# EAGLE board RCT_Board_s2023 (EAGLE 9.2.0)
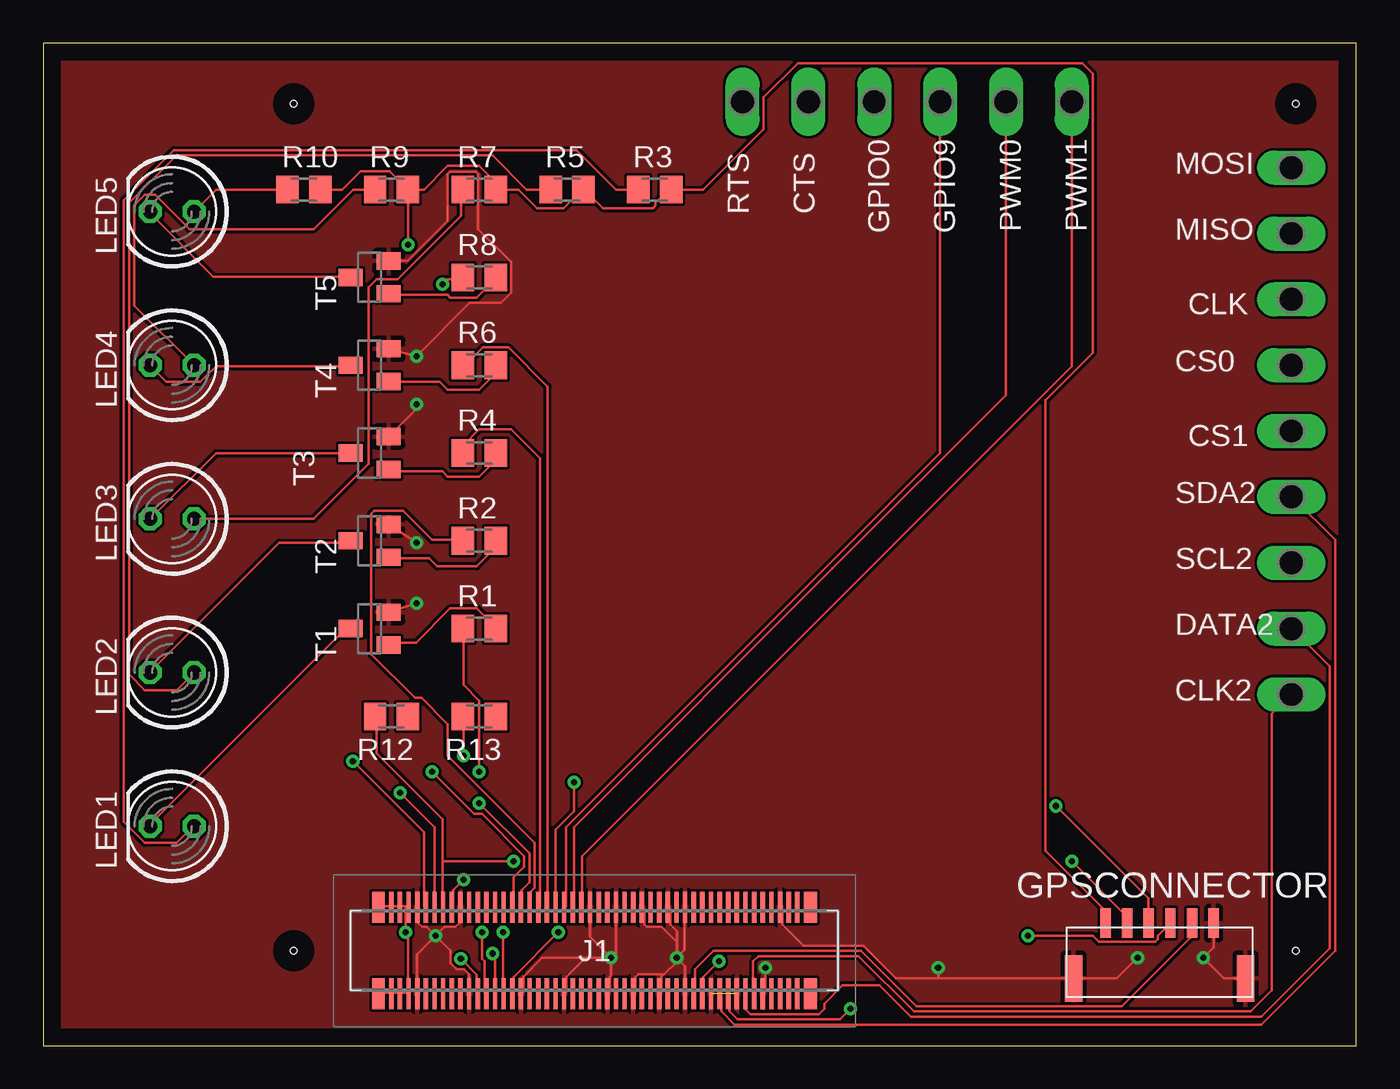
[diagram p0: board, top side]
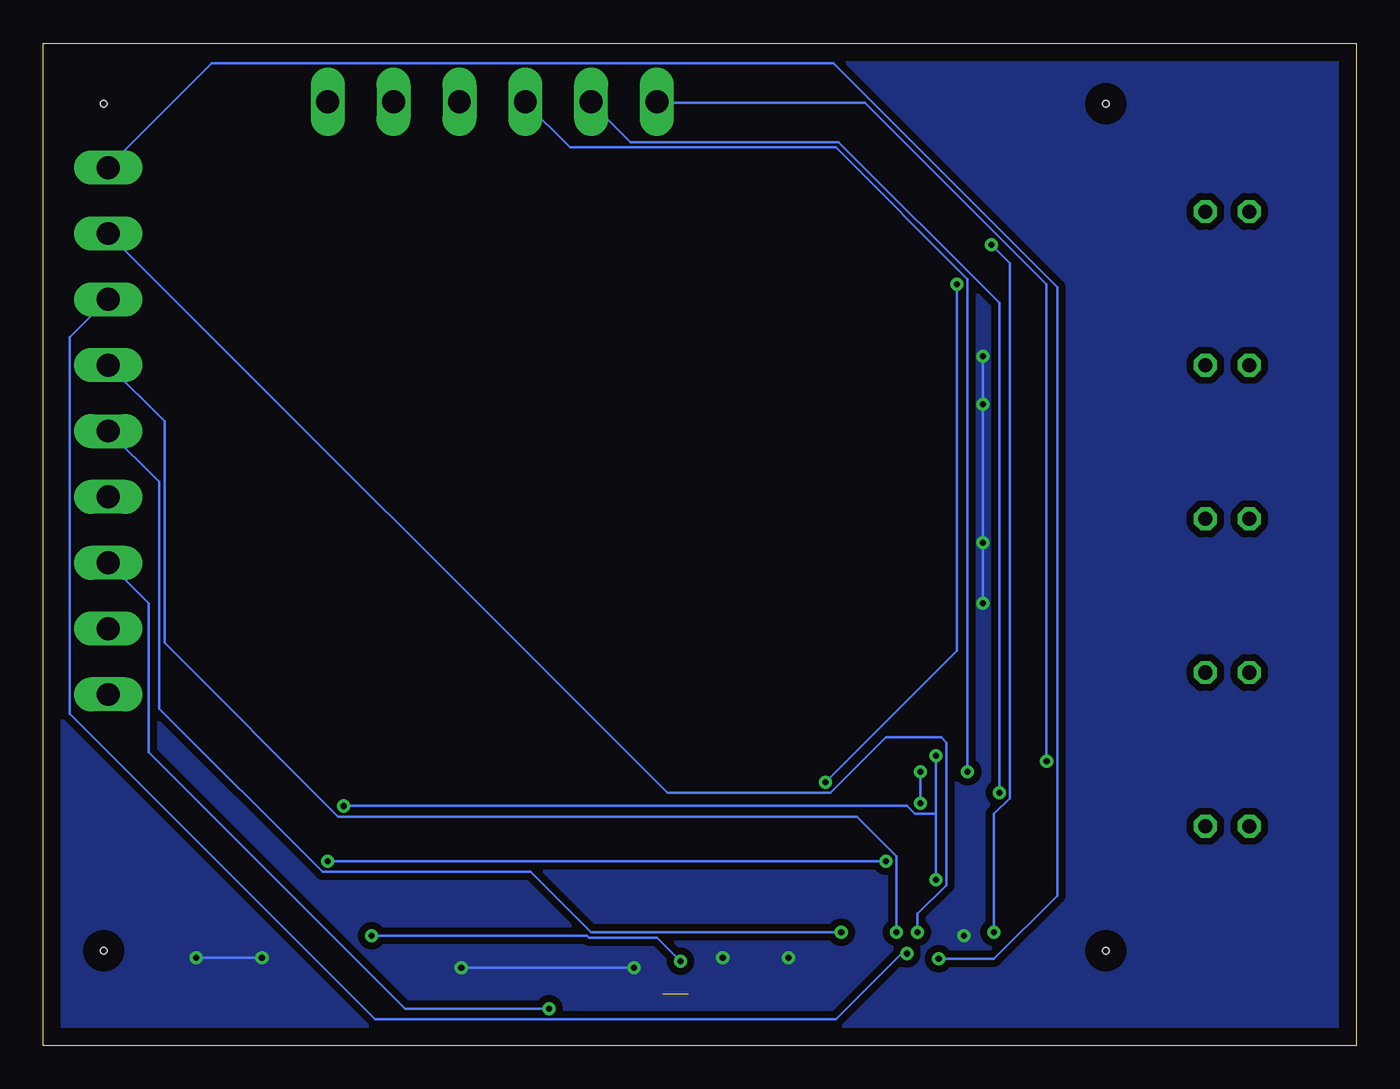
[diagram p1: board, bottom side, seen from below]

Size 76 x 58 mm. Coordinates in mm from the lower left corner, seen from the top.
Outline: 0,0 76,0 76,58 0,58 0,0
Copper layers (1*16): Top 0.035mm / dielectric 1.5mm / Bottom 0.035mm
Design rules "default": minimum track width 6mil, minimum drill 0.35mm, track to track 6mil, track to pad 6mil, pad to pad 6mil, via to via 6mil, smd to smd 6mil, copper to edge 40mil, drill to drill 6mil, minimum pad ring 10mil, minimum via ring 8mil, stop-mask expansion 4mil, vias tented up to drill 0mil, thermal gap 10mil
Holes 0.35 mm at 14.5,5.5 72.5,5.5 72.5,54.5 14.5,54.5

## Footprints (pad centres in the part's own frame; a part is rotated, then mirrored left to right if it is on the bottom)
P1-13Y = drill 1.321 pad 1.905 long: TP 0,0
SM06B-GHS-TB = smd 0.6 x 1.7: 1 -3.125,4.55; 2 -1.875,4.55; 3 -0.625,4.55; 4 0.625,4.55; 5 1.875,4.55; 6 3.125,4.55 | smd 1 x 2.7: G1 -4.975,1.35; G2 4.975,1.35
AXK5S00247YG = smd 0.75 x 1.8: 1 -12.5,-2.5; 2 -12.5,2.5; 99 12.5,-2.5; 100 12.5,2.5 | smd 0.25 x 1.8: 3 -11.75,-2.5; 4 -11.75,2.5; 5 -11.25,-2.5; 6 -11.25,2.5; 7 -10.75,-2.5; 8 -10.75,2.5; 9 -10.25,-2.5; 10 -10.25,2.5; 11 -9.75,-2.5; 12 -9.75,2.5; 13 -9.25,-2.5; 14 -9.25,2.5; 15 -8.75,-2.5; 16 -8.75,2.5; 17 -8.25,-2.5; 18 -8.25,2.5; 19 -7.75,-2.5; 20 -7.75,2.5; 21 -7.25,-2.5; 22 -7.25,2.5; 23 -6.75,-2.5; 24 -6.75,2.5; 25 -6.25,-2.5; 26 -6.25,2.5; 27 -5.75,-2.5; 28 -5.75,2.5; 29 -5.25,-2.5; 30 -5.25,2.5; 31 -4.75,-2.5; 32 -4.75,2.5; 33 -4.25,-2.5; 34 -4.25,2.5; 35 -3.75,-2.5; 36 -3.75,2.5; 37 -3.25,-2.5; 38 -3.25,2.5; 39 -2.75,-2.5; 40 -2.75,2.5; 41 -2.25,-2.5; 42 -2.25,2.5; 43 -1.75,-2.5; 44 -1.75,2.5; 45 -1.25,-2.5; 46 -1.25,2.5; 47 -0.75,-2.5; 48 -0.75,2.5; 49 -0.25,-2.5; 50 -0.25,2.5; 51 0.25,-2.5; 52 0.25,2.5; 53 0.75,-2.5; 54 0.75,2.5; 55 1.25,-2.5; 56 1.25,2.5; 57 1.75,-2.5; 58 1.75,2.5; 59 2.25,-2.5; 60 2.25,2.5; 61 2.75,-2.5; 62 2.75,2.5; 63 3.25,-2.5; 64 3.25,2.5; 65 3.75,-2.5; 66 3.75,2.5; 67 4.25,-2.5; 68 4.25,2.5; 69 4.75,-2.5; 70 4.75,2.5; 71 5.25,-2.5; 72 5.25,2.5; 73 5.75,-2.5; 74 5.75,2.5; 75 6.25,-2.5; 76 6.25,2.5; 77 6.75,-2.5; 78 6.75,2.5; 79 7.25,-2.5; 80 7.25,2.5; 81 7.75,-2.5; 82 7.75,2.5; 83 8.25,-2.5; 84 8.25,2.5; 85 8.75,-2.5; 86 8.75,2.5; 87 9.25,-2.5; 88 9.25,2.5; 89 9.75,-2.5; 90 9.75,2.5; 91 10.25,-2.5; 92 10.25,2.5; 93 10.75,-2.5; 94 10.75,2.5; 95 11.25,-2.5; 96 11.25,2.5; 97 11.75,-2.5; 98 11.75,2.5
LED5MM = drill 0.813 octagon: A -1.27,0; K 1.27,0
M0805 = smd 1.3 x 1.6: 1 -0.95,0; 2 0.95,0
SOT23 = smd 1 x 1.4: 1 -0.95,-1.1; 2 0.95,-1.1; 3 0,1.1

## Placement (x,y rotation side)
CLK  PTR1PAD1-13Y  [P1-13Y]  72.23,43.18 90 top
CLK2  PTR1PAD1-13Y  [P1-13Y]  72.23,20.32 270 top
CS0  PTR1PAD1-13Y  [P1-13Y]  72.23,39.37 270 top
CS1  PTR1PAD1-13Y  [P1-13Y]  72.23,35.56 90 top
CTS  PTR1PAD1-13Y  [P1-13Y]  44.29,54.61 0 top
DATA2  PTR1PAD1-13Y  [P1-13Y]  72.23,24.13 270 top
GPIO0  PTR1PAD1-13Y  [P1-13Y]  48.1,54.61 180 top
GPIO9  PTR1PAD1-13Y  [P1-13Y]  51.91,54.61 180 top
GPSCONNECTOR  GPS_CONN  [SM06B-GHS-TB]  64.61,2.54 0 top
J1  AXK5S00247YG  [AXK5S00247YG]  31.9,5.5 0 top
LED1  WP7083ZGD/G  [LED5MM]  7.46,12.7 180 top
LED2  WP7083SYD/J3  [LED5MM]  7.46,21.59 180 top
LED3  WP7083SED/J3  [LED5MM]  7.46,30.48 180 top
LED4  WP7113SRD/F  [LED5MM]  7.46,39.37 180 top
LED5  WP7083QBD/G  [LED5MM]  7.46,48.26 180 top
MISO  PTR1PAD1-13Y  [P1-13Y]  72.23,46.99 270 top
MOSI  PTR1PAD1-13Y  [P1-13Y]  72.23,50.8 270 top
PWM0  PTR1PAD1-13Y  [P1-13Y]  55.72,54.61 180 top
PWM1  PTR1PAD1-13Y  [P1-13Y]  59.53,54.61 180 top
R1  2.2k  [M0805]  25.24,24.13 0 top
R2  2.2k  [M0805]  25.24,29.21 0 top
R3  82  [M0805]  35.4,49.53 0 top
R4  2.2k  [M0805]  25.24,34.29 0 top
R5  82  [M0805]  30.32,49.53 0 top
R6  2.2k  [M0805]  25.24,39.37 0 top
R7  82  [M0805]  25.24,49.53 0 top
R8  2.2k  [M0805]  25.24,44.45 0 top
R9  82  [M0805]  20.16,49.53 0 top
R10  82  [M0805]  15.08,49.53 0 top
R12  0  [M0805]  20.16,19.05 180 top
R13  0  [M0805]  25.24,19.05 180 top
RTS  PTR1PAD1-13Y  [P1-13Y]  40.48,54.61 0 top
SCL2  PTR1PAD1-13Y  [P1-13Y]  72.23,27.94 270 top
SDA2  PTR1PAD1-13Y  [P1-13Y]  72.23,31.75 270 top
T1  BC847  [SOT23]  18.89,24.13 90 top
T2  BC847  [SOT23]  18.89,29.21 90 top
T3  BC847  [SOT23]  18.89,34.29 90 top
T4  BC847  [SOT23]  18.89,39.37 90 top
T5  BC847  [SOT23]  18.89,44.45 90 top

## Library data of the parts
CLK CLK2 CS0 CS1 CTS DATA2 GPIO0 GPIO9 MISO MOSI PWM0 PWM1 RTS SCL2 SDA2 = testpad
GPSCONNECTOR = rct_ui_board
J1 = AXK5S00247YG; DESCRIPTION: PANASONIC - AXK5S00247YG - CONN, STACKING, RCPT, 100POS, 2ROW; HEIGHT: 3.75mm; MANUFACTURER_NAME: Panasonic; MANUFACTURER_PART_NUMBER: AXK5S00247YG; MOUSER_PART_NUMBER: 769-AXK5S00247YG; MOUSER_PRICE-STOCK: https://www.mouser.co.uk/ProductDetail/Panasonic-Industrial-Devices/AXK5S00247YG?qs=2rFUEsTwVNyMbQGzA%252BKgFQ%3D%3D
LED1-LED5 = led
R1-R10 R12 R13 = rcl; SPICEPREFIX: R
T1-T5 = transistor

## Nets
+5V: GPSCONNECTOR.1 J1.1 J1.2 J1.3 J1.4 J1.5 J1.6 J1.7 J1.8 R3.2 R5.2 R7.2 R9.2 R10.2
GND: GPSCONNECTOR.6 GPSCONNECTOR.G1 GPSCONNECTOR.G2 J1.9 J1.10 J1.20 J1.21 J1.33 J1.43 J1.50 J1.53 J1.56 J1.59 J1.62 J1.65 J1.68 J1.71 J1.72 J1.77 J1.83 J1.89 J1.94 T1.2 T2.2 T3.2 T4.2 T5.2
GPIO1: J1.34 R1.1
GPIO2: J1.36 R2.1
GPIO3: J1.38 R4.1
GPIO4: J1.40 R6.1
GPIO7: J1.42 R8.1
I2C1_SCL: J1.81 SCL2.TP
I2C1_SDA: J1.79 SDA2.TP
ISH_I2C1_CLK: CLK2.TP J1.87
ISH_I2C1_DATA: DATA2.TP J1.85
N$1: LED1.K T1.3
N$2: R1.2 T1.1
N$3: LED2.K T2.3
N$4: LED3.K T3.3
N$5: LED4.K T4.3
N$6: LED5.K T5.3
N$7: R2.2 T2.1
N$8: LED1.A R3.1
N$9: R4.2 T3.1
N$10: LED2.A R5.1
N$11: R6.2 T4.1
N$12: LED3.A R7.1
N$13: R8.2 T5.1
N$14: LED4.A R9.1
N$15: LED5.A R10.1
RXD: GPSCONNECTOR.3 J1.18 R13.2
SCL: GPSCONNECTOR.4 J1.75
SDA: GPSCONNECTOR.5 J1.73
SOC_PWM0: J1.46 PWM0.TP
SOC_PWM1: J1.48 PWM1.TP
SPI2_CLK: CLK.TP J1.27
SPI2_CS0: CS0.TP J1.29
SPI2_CS1: CS1.TP J1.31
SPI2_MISO: J1.25 MISO.TP
SPI2_MOSI: J1.23 MOSI.TP
TESTGPIO0: GPIO0.TP J1.32
TESTGPIO9: GPIO9.TP J1.44
TXD: GPSCONNECTOR.2 J1.16 R12.2
UART1_CTS: CTS.TP J1.14
UART1_RTS: J1.12 RTS.TP

## Tracks (layer width: path | path; a pad name or v marks a point on that pad's centre or on a via)
+5V  (via drill 0.35)
  Top 0.152: J1.1 19.45,3.05 20.06,3.05 J1.3 20.21,3.05 20.67,3.05 | 20.67,3.05 21.12,3.05 | 20.67,3.05 J1.5 | J1.2 19.45,8.08 20.06,8.08 J1.4 20.21,8.08 20.67,8.08 | 20.67,8.08 20.97,8.08 | 20.97,8.08 21.12,8.08 J1.8 | 20.67,8.08 J1.6 | 20.97,8.08 v20.97,6.55 21.12,6.4 21.12,3.05 | 21.12,3.05 J1.7 | R10.2 17.32,49.53 18.38,50.6 20.06,50.6 21.12,49.53 | GPSCONNECTOR.1 61.36,7.16 61.36,7.92 58.01,11.28 58.01,37.34 60.75,40.08 60.75,56.24 60.14,56.84 43.68,56.84 41.7,54.86 41.7,53.03 38.19,49.53 R3.2 36.21,49.53 35.45,48.77 35.45,48.62 35.3,48.46 32.4,48.46 31.34,49.53 R5.2 31.18,49.53 30.12,48.46 28.59,48.46 27.53,49.53 R7.2 26.15,49.53 26.15,49.99 25.24,50.9 23.41,50.9 22.04,49.53 21.12,49.53 | 21.12,49.53 v21.12,46.33 | 21.12,49.53 R9.2
  Bottom 0.152: v20.97,6.55 20.97,13.41 20.06,14.33 20.06,45.26 v21.12,46.33
GND  (via drill 0.35)  (1 unrouted)
  Top 0.152: 20.06,25.15 T1.2 v21.6,25.6 | 20.06,30.02 T2.2 v21.6,29.1 | 20.06,35.2 T3.2 21.6,36.85 v21.6,37.1 | 20.06,40.23 T4.2 v21.6,39.9 24.68,42.98 26.49,42.98 27.07,43.55 27.07,45.34 25.17,47.24 25.17,50.42 25.04,50.56 23.55,50.56 23.41,50.42 23.41,47.72 21.09,45.4 T5.2 20.06,45.41 | 69.44,3.96 GPSCONNECTOR.G2 68.34,3.89 v67.15,5.08 67.76,5.69 67.76,7.01 GPSCONNECTOR.6 67.61,7.16 67.61,7.47 | 59.68,3.96 GPSCONNECTOR.G1 | 42.61,8.08 J1.94 42.8,7.85 42.8,7 44.01,5.79 47.46,5.79 49.37,3.89 51.8,3.89 | 24.17,7.92 J1.20 24.15,7.15 23.87,6.87 23.22,6.87 v22.7,6.35 | 41.7,3.05 J1.89 41.8,3.15 41.8,4 v41.8,4.5 | J1.72 37.13,7.92 37.13,5.54 v36.67,5.08 | 59.53,3.96 GPSCONNECTOR.G1 | v36.67,5.08 37.15,4.6 J1.71 | J1.68 36.3,7.85 36.3,7 36.67,6.63 v36.67,5.08 | J1.65 35.8,3.15 35.8,4 35.93,4.13 | v36.67,5.08 36.67,4.87 35.93,4.13 | J1.50 31.65,6.29 v32.86,5.08 | J1.43 30.3,3.15 30.3,4 31.38,5.08 | 31.38,5.08 v32.86,5.08 | v32.86,5.08 33.15,5.37 J1.56 | J1.9 21.65,5.3 v22.7,6.35 | J1.21 24.65,4.12 24.35,4.42 23.92,4.42 23.57,4.78 23.57,5.48 v22.7,6.35 | J1.33 27.8,3.15 27.8,4 28.88,5.08 31.38,5.08 | v22.7,6.35 22.18,6.87 21.93,6.87 21.65,7.15 J1.10 | v32.86,5.08 32.86,4.06 32.8,4 32.8,3.15 J1.53 | J1.59 34.3,3.15 34.3,4 34.43,4.13 35.93,4.13 | v36.67,5.08 36.67,5.98 35.78,6.87 34.93,6.87 34.8,7 34.8,7.85 J1.62 | 51.8,3.89 GPSCONNECTOR.G1 | GPSCONNECTOR.G1 62.15,3.89 v63.34,5.08 | v51.8,4.5 51.8,3.89
  Bottom 0.152: v63.34,5.08 v67.15,5.08 | v41.8,4.5 v51.8,4.5 | v21.6,39.9 v21.6,37.1 v21.6,29.1 v21.6,25.6
  pour Bottom (isolate 0.406): 0,58 76,58 76.1,58.1 76.1,0.1 0,0.1
  pour Top: 0,58 76,58 76,0 0.1,0 0,0.1
GPIO1  (via drill 0.35)
  Top 0.152: v25.24,15.85 25.24,19.96 24.33,20.88 24.33,24.08 R1.1 | v25.24,14.02 28.14,11.12 28.14,9.45 27.68,8.99 27.68,8.08 J1.34
  Bottom 0.152: v25.24,14.02 v25.24,15.85
GPIO2
  Top 0.152: R2.1 24.17,29.26 22.5,29.26 20.82,30.94 19.14,30.94 18.99,30.79 18.99,22.66 21.53,20.12 21.89,20.12 23.41,18.59 23.41,16.76 28.44,11.73 28.44,9.14 28.14,8.84 28.14,8.08 J1.36
GPIO3
  Top 0.152: R4.1 24.33,34.29 24.33,34.75 25.24,35.66 27.07,35.66 28.75,33.98 28.75,8.08 J1.38
GPIO4
  Top 0.152: 24.33,39.78 24.33,39.47 R6.1 24.42,39.37 25.45,40.4 26.93,40.4 29.2,38.13 29.2,8.08 J1.40
GPIO7  (via drill 0.35)
  Top 0.152: v23.11,44.04 23.41,44.35 24.17,44.35 R8.1 | v30.73,15.24 30.73,13.56 29.66,12.5 29.66,8.08 J1.42
  Bottom 0.152: v23.11,44.04 23.11,22.86 v30.73,15.24
I2C1_SCL  (via drill 0.35)
  Top 0.152: v46.73,2.13 46.12,1.52 40.17,1.52 39.72,1.98 39.72,2.9 J1.81
  Bottom 0.152: v46.73,2.13 55.06,2.13 69.89,16.97 69.89,25.6 SCL2.TP
I2C1_SDA
  Top 0.152: J1.79 39.26,2.9 39.26,1.98 40.02,1.22 70.5,1.22 74.77,5.49 74.77,29.26 72.33,31.7 SDA2.TP
ISH_I2C1_CLK
  Top 0.152: CLK2.TP 71.11,19.2 71.11,3.2 69.89,1.98 50.39,1.98 47.19,5.18 41.39,5.18 41.09,4.88 41.09,3.05 J1.87
ISH_I2C1_DATA
  Top 0.152: J1.85 40.63,2.9 40.63,2.13 40.94,1.83 44.9,1.83 45.2,2.13 45.2,2.44 46.27,3.5 48.41,3.5 50.23,1.68 70.5,1.68 74.47,5.64 74.47,21.95 72.33,24.08 DATA2.TP
N$1
  Top 0.152: T1.3 17.77,24.08 17.47,24.08 6.19,12.8 LED1.K
N$2
  Top 0.152: T1.1 20.06,23.32 21.58,23.32 23.56,25.3 25.09,25.3 26.15,24.23 R1.2
N$3
  Top 0.152: T2.3 17.77,29.11 13.66,29.11 6.19,21.64 LED2.K
N$4
  Top 0.152: T3.3 10,34.29 LED3.K
N$5
  Top 0.152: T4.3 17.77,39.32 10,39.32 9.09,38.41 7.1,38.41 6.19,39.32 LED4.K
N$6
  Top 0.152: T5.3 17.77,44.5 9.85,44.5 6.19,48.16 LED5.K
N$7
  Top 0.152: T2.1 20.06,28.19 22.34,28.19 22.8,27.74 25.09,27.74 26.15,28.8 26.15,29.11 R2.2
N$8
  Top 0.152: R3.1 33.16,49.53 30.88,51.82 7.56,51.82 4.67,48.92 4.67,12.95 5.88,11.73 7.71,11.73 8.63,12.65 LED1.A
N$9
  Top 0.152: T3.1 20.06,33.22 23.11,33.22 23.41,32.92 25.24,32.92 26.15,33.83 26.15,34.29 R4.2
N$10
  Top 0.152: R5.1 27.98,49.53 26,51.51 7.71,51.51 4.97,48.77 4.97,21.49 5.88,20.57 7.71,20.57 LED2.A
N$11
  Top 0.152: T4.1 20.06,38.41 22.95,38.41 23.41,37.95 25.24,37.95 26.15,38.86 26.15,39.32 R6.2
N$12
  Top 0.152: LED3.A 15.64,30.48 18.84,33.68 18.84,43.89 19.3,44.35 20.52,44.35 24.17,48.01 24.17,49.53 R7.1
N$13
  Top 0.152: T5.1 20.06,43.43 23.41,43.43 23.56,43.28 25.09,43.28 26.15,44.35 R8.2
N$14
  Top 0.152: R9.1 17.93,49.53 15.64,47.24 8.48,47.24 6.5,49.23 5.88,49.23 5.28,48.62 5.28,42.82 LED4.A
N$15
  Top 0.152: R10.1 10,49.53 LED5.A
RXD  (via drill 0.35)
  Top 0.152: v24.33,16.76 24.33,19.05 R13.2 | v24.33,9.6 23.72,8.99 23.72,8.08 J1.18 | v58.62,13.87 63.95,8.53 63.95,7.16 GPSCONNECTOR.3
  Bottom 0.152: v24.33,9.6 24.33,13.41 | 24.33,13.41 v24.33,16.76 | v58.62,13.87 26,13.87 25.55,13.41 24.33,13.41
SCL  (via drill 0.35)
  Top 0.152: v39.11,4.88 38.19,3.96 38.19,3.05 J1.75 | 65.17,7.01 GPSCONNECTOR.4 64.51,6.37 64.51,6.14 64.38,6.01 61.09,6.01 60.75,6.35 v56.99,6.35
  Bottom 0.152: v39.11,4.88 40.48,6.25 44.42,6.25 44.52,6.35 v56.99,6.35
SDA
  Top 0.152: GPSCONNECTOR.5 66.39,7.01 66.39,6.25 62.43,2.29 50.54,2.29 47.34,5.49 38.8,5.49 37.74,4.42 37.74,3.05 J1.73
SOC_PWM0
  Top 0.152: PWM0.TP 55.72,37.64 45.69,27.61 30.73,12.65 30.73,8.08 J1.46
SOC_PWM1
  Top 0.152: PWM1.TP 59.53,39.32 31.18,10.97 31.18,8.08 J1.48
SPI2_CLK  (via drill 0.35)
  Top 0.152: v26,5.33 26.15,5.18 26.15,3.05 J1.27
  Bottom 0.152: v26,5.33 26.31,5.33 30.12,1.52 56.79,1.52 74.47,19.2 74.47,41 72.33,43.13 CLK.TP
SPI2_CS0  (via drill 0.35)
  Top 0.152: v26.61,6.55 26.61,3.05 J1.29
  Bottom 0.152: v26.61,6.55 26.61,10.97 28.9,13.26 58.92,13.26 68.98,23.32 68.98,36.12 CS0.TP
SPI2_CS1  (via drill 0.35)
  Top 0.152: v29.81,6.55 27.22,3.96 27.22,3.05 J1.31
  Bottom 0.152: v29.81,6.55 44.29,6.55 47.8,10.06 59.84,10.06 69.28,19.51 69.28,32.61 CS1.TP
SPI2_MISO  (via drill 0.35)
  Top 0.152: v25.39,6.55 25.39,5.03 25.55,4.88 25.55,3.05 J1.25
  Bottom 0.152: v25.39,6.55 25.39,7.62 23.72,9.3 23.72,17.53 24.02,17.83 27.22,17.83 30.42,14.63 39.87,14.63 MISO.TP
SPI2_MOSI  (via drill 0.35)
  Top 0.152: J1.23 25.09,3.05 25.09,4.12 v24.17,5.03
  Bottom 0.152: MOSI.TP 72.18,50.9 66.24,56.84 30.27,56.84 17.32,43.89 17.32,8.69 20.97,5.03 v24.17,5.03
TESTGPIO0  (via drill 0.35)
  Top 0.152: v22.5,15.85 24.94,13.41 25.39,13.41 27.83,10.97 27.83,10.36 27.22,9.75 27.22,8.08 J1.32
  Bottom 0.152: v22.5,15.85 22.5,44.35 30.12,51.97 45.51,51.97 48.1,54.56 GPIO0.TP
TESTGPIO9
  Top 0.152: GPIO9.TP 51.91,34.29 30.27,12.65 30.27,8.08 J1.44
TXD  (via drill 0.35)
  Top 0.152: 23.11,10.67 23.11,8.08 J1.16 | 23.11,10.67 23.11,13.11 19.3,16.92 19.3,19.05 R12.2 | v59.53,10.67 62.73,7.47 62.73,7.16 GPSCONNECTOR.2 | 23.11,10.67 v27.22,10.67
  Bottom 0.152: v27.22,10.67 v59.53,10.67
UART1_CTS  (via drill 0.35)
  Top 0.152: v20.67,14.63 22.65,12.65 22.65,8.08 J1.14
  Bottom 0.152: v20.67,14.63 20.67,42.98 29.96,52.27 42,52.27 44.29,54.56 CTS.TP
UART1_RTS  (via drill 0.35)
  Top 0.152: v17.93,16.46 22.04,12.34 22.04,8.08 J1.12
  Bottom 0.152: v17.93,16.46 17.93,44.04 28.44,54.56 40.48,54.56 RTS.TP